# Altium PCB pcbRocketry.pcbdoc
Units mil, origin at the board's own origin, x right, y up, seen from the top; angles counter-clockwise.
Board outline 4335 x 3060 mil, 2 copper layers (Top Layer, Bottom Layer); 27 components, 17 nets, 147 pads, 21 vias.
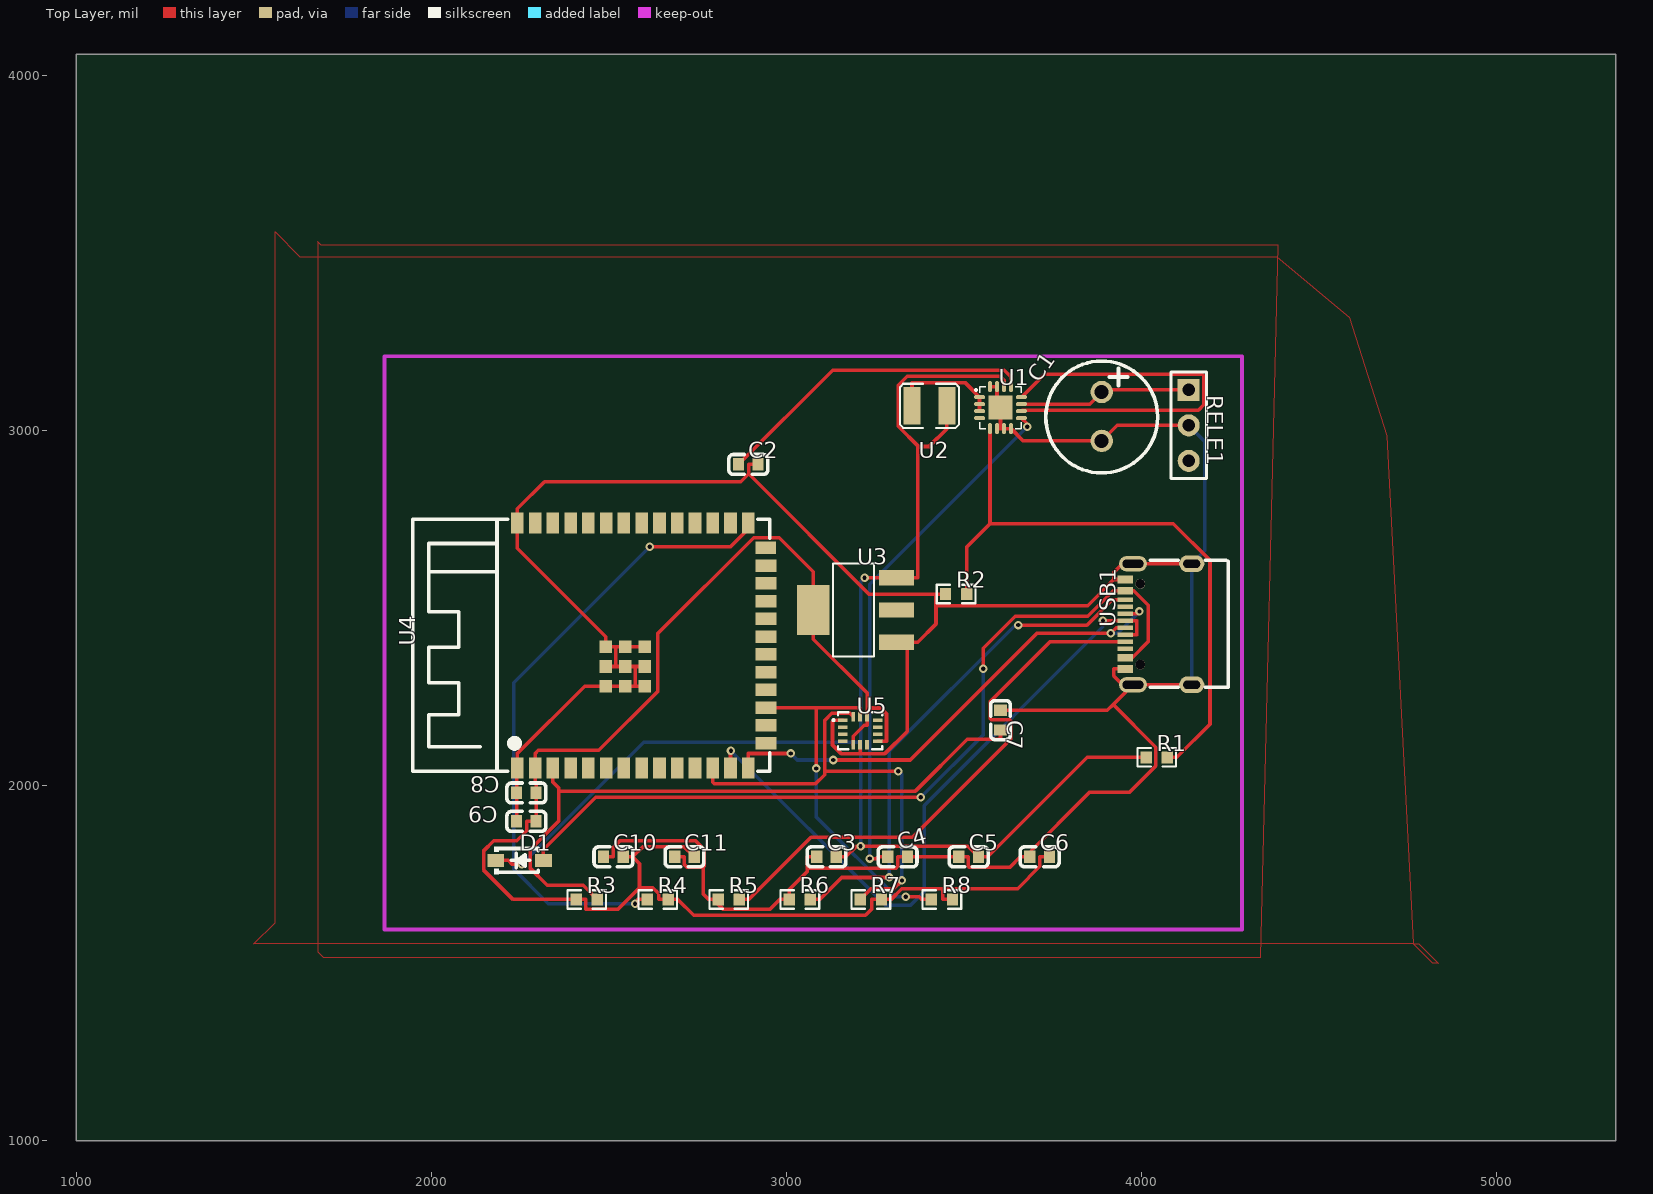
[diagram p0: Top Layer view]
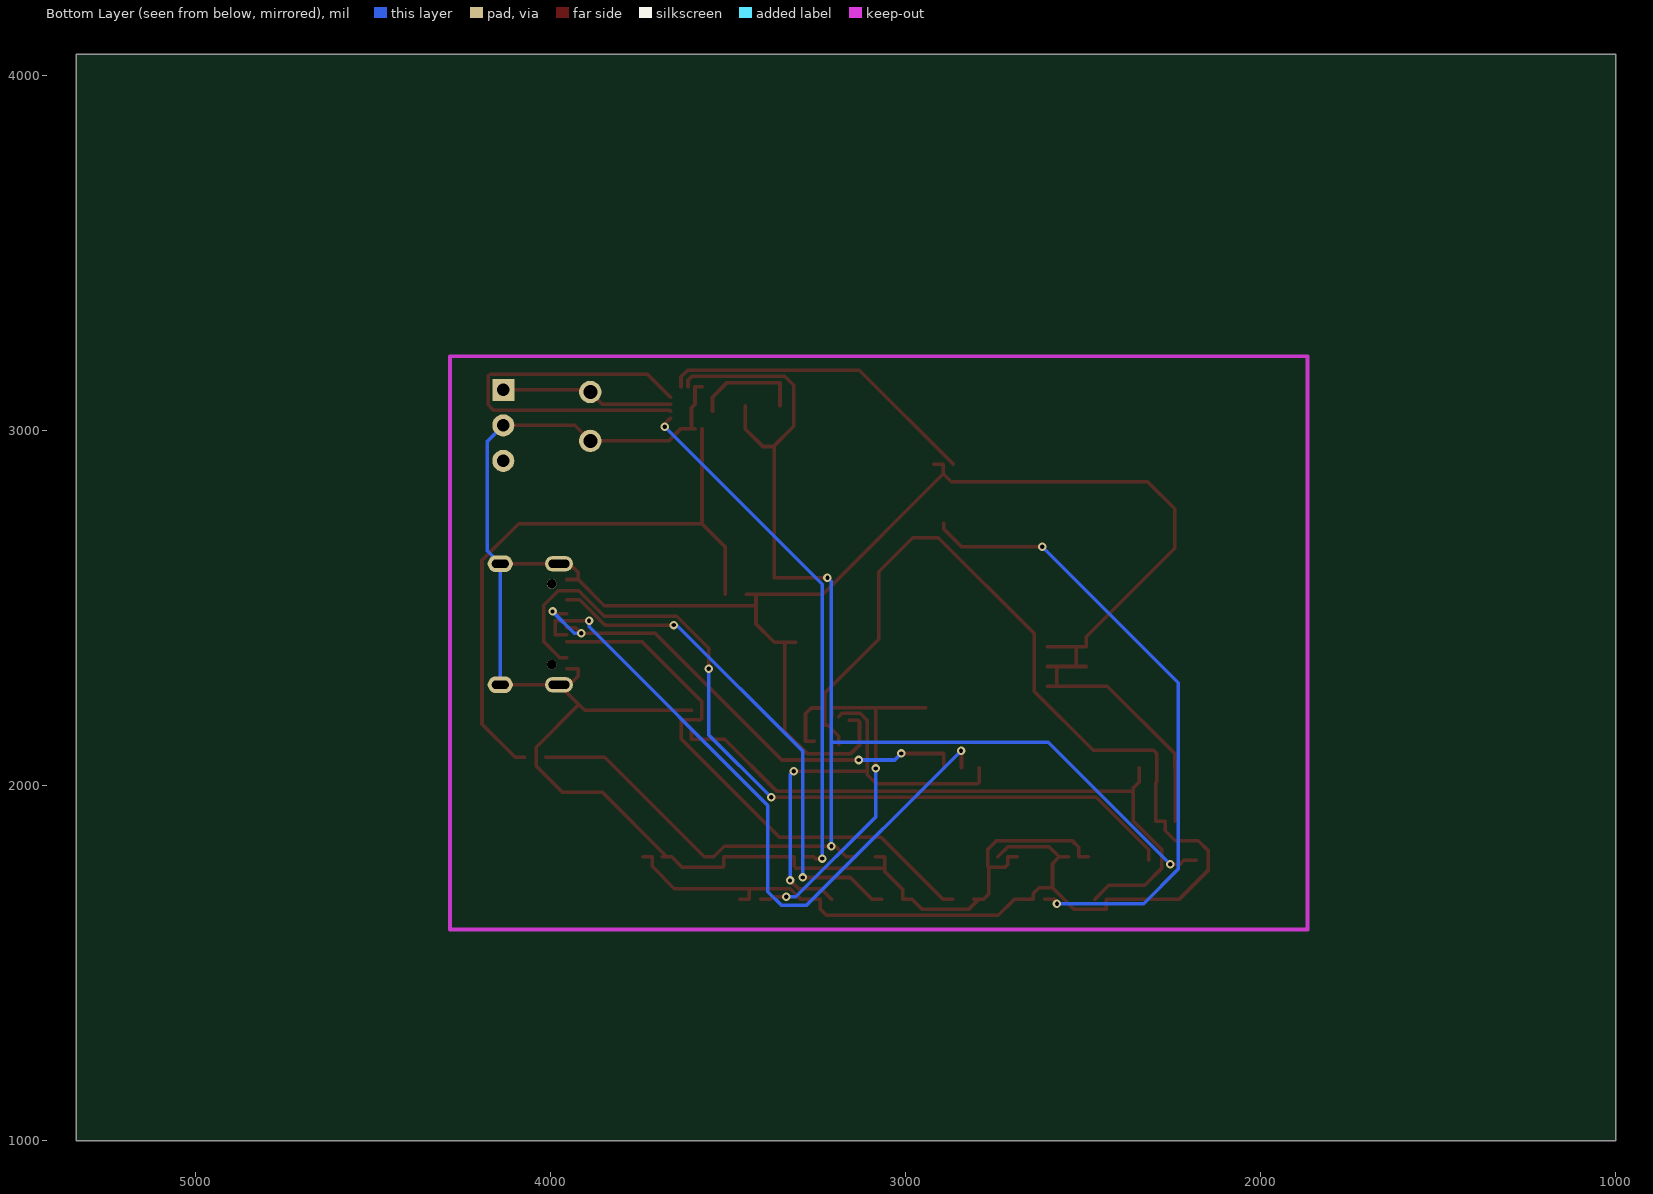
[diagram p1: Bottom Layer view, seen from below]

## Layer stack, top to bottom
Top Layer: signal copper (thickness not stored)
Dielectric: dielectric 12.6, FR-4, Dk 4.8
Bottom Layer: signal copper (thickness not stored)

## Board outline
5335,1000 1000,1000 1000,4060 5335,4060

## Components (designator, comment, footprint, x,y, rotation, side; value= is the part's Value field where it differs from the comment)
C1 "470uF" CAP-TH_BD8.0-P3.50-D0.5-FD_470UF25VF140KM 3887.5,3040 r270 top
C2 "10uF" C0603 2892.5,2905 r0 top
C3 "22uF" C0603 3112.69,1800 r0 top
C4 "3.3nF" C0603 3312.69,1800 r0 top
C5 "10uF" C0603 3512.69,1800 r0 top
C6 "22uF" C0603 3712.69,1800 r0 top
C7 "1uF" C0603 3602.5,2185 r270 top
C8 "0.1uF" C0603 2267.5,1980 r180 top
C9 "10uF" C0603 2267.5,1900 r0 top
C10 "0.1uF" C0603 2512.69,1800 r0 top
C11 "0.1u" C0603 2712.69,1800 r0 top
D1 "1N5819HW" SOD-123_L2.7-W1.6-LS3.7-RD-1 2248.52,1790 r0 top
R1 "523k" R0603 4042.5,2080 r0 top
R2 "100k" R0603 3477.5,2540 r0 top
R3 "10k" R0603 2437.5,1680 r0 top
R4 "10k" R0603 2637.5,1680 r0 top
R5 "5.1k" R0603 2837.5,1680 r0 top
R6 "5.1k" R0603 3037.5,1680 r0 top
R7 "4.7k" R0603 3237.5,1680 r0 top
R8 "4.7k" R0603 3437.5,1680 r0 top
RELE1 "UBEC" HDR-M-2.54_1X3 4132.5,3015 r270 top
U1 "TPS62130RGTRF0" VQFN-16_L3.0-W3.0-P0.50-TL-EP1.7 3602.5,3065 r0 top
U2 "2.2uH" IND-SMD_L3.2-W2.5_CKST322512-2.2UH 3402.5,3070 r0 top
U3 "AMS1117-3.3_C22466222" SOT-223-3_L6.5-W3.4-P2.30-LS7.0-BR 3192.5,2495 r0 top
U4 "ESP32-S3-WROOM-1(N8R2)" WIRELM-SMD_ESP32-S3-WROOM-1 2592.5,2395 r90 top
U5 "ICM42688P" LGA-14_L3.0-W2.5-P0.50-TL 3207.5,2155 r0 top
USB1 "TYPE-C 16PIN 2MD(073)" USB-C-SMD_TYPE-C-6PIN-2MD-073 4047.5,2455 r90 top

## Footprints (in the part's own frame and the unit in brackets; to place one, negate y for a bottom-side part, rotate by r counter-clockwise, add the part's x,y. Pads: shape width x height; smd on the part's side, far side on the other; paste and mask are expansions set on the pad)
C0603 [mm]
  rect 0.8x0.9 smd paste+0 mask+0.051: 1(-0.7,0) 2(0.7,0)
  silkscreen extent -1.39,-0.71 1.39,0.71
CAP-TH_BD8.0-P3.50-D0.5-FD_470UF25VF140KM [mm]
  round 1.6 hole 1 paste+0 mask+0.051: 1(-1.75,0) 2(1.75,0)
  silkscreen extent -3.96,-4 4.04,4
HDR-M-2.54_1X3 [mil]
  rect 62x62 hole 35 paste+0 mask+2: 1(-100,0)
  round 62 hole 35 paste+0 mask+2: 2(0,0) 3(100,0)
  silkscreen extent -150,-50 150,50
IND-SMD_L3.2-W2.5_CKST322512-2.2UH [mm]
  rect 1.2x2.7 smd paste+0 mask+0.051: 1(-1.25,0) 2(1.25,0)
  silkscreen extent -2.1,-1.58 2.1,1.58
LGA-14_L3.0-W2.5-P0.50-TL [mm]
  rect 0.675x0.28 smd paste+0 mask+0.051: 1(-1.262,0.75) 2(-1.262,0.25) 3(-1.262,-0.25) 4(-1.262,-0.75) 8(1.262,-0.75) 9(1.262,-0.25) 10(1.262,0.25) 11(1.262,0.75)
  rect 0.28x0.675 smd paste+0 mask+0.051: 5(-0.5,-1.012) 6(0,-1.012) 7(0.5,-1.012) 12(0.5,1.012) 13(0,1.012) 14(-0.5,1.012)
  silkscreen extent -1.98,-1.33 1.58,1.33
R0603 [mil]
  rect 31.75x34.02 smd paste-3937.01 mask+2: 1(-29.66,0) 2(29.66,0)
  silkscreen extent -55,-26 55,26
SOD-123_L2.7-W1.6-LS3.7-RD-1 [mm]
  rect 1.2x0.95 smd paste+0 mask+0.051: 1(-1.7,0) 2(1.7,0)
  silkscreen extent -1.81,-0.98 1.35,0.98
SOT-223-3_L6.5-W3.4-P2.30-LS7.0-BR [mm]
  rect 2.5x1.1 smd paste+0 mask+0.051: 1(2.97,-2.3) 2(2.97,0) 3(2.97,2.3)
  rect 2.34x3.6 smd paste+0 mask+0.051: 4(-2.97,0)
  silkscreen extent -1.57,-3.33 1.37,3.33
USB-C-SMD_TYPE-C-6PIN-2MD-073 [mm]
  rect 0.55x1.1 smd paste-100 mask+0.05: 1(-3.2,2.375) 2(-2.4,2.375) 11(2.4,2.375) 12(3.2,2.375)
  rect 0.3x1.1 smd paste-100 mask+0.05: 3(-1.75,2.375) 4(-1.25,2.375) 5(-0.75,2.375) 6(-0.25,2.375) 7(0.25,2.375) 8(0.75,2.375) 9(1.25,2.375) 10(1.75,2.375)
  oval 1.2x1.8 hole 0.6 slot 1.2 at 90 deg paste+0 mask+0.05: 13(-4.325,-2.375) 14(4.325,-2.375)
  oval 1.1x2 hole 0.6 slot 1.5 at 90 deg paste+0 mask+0.05: 13(-4.325,1.825) 14(4.325,1.825)
  round 0.7 hole 0.7 unplated paste+0: ""(-2.89,1.305) ""(2.89,1.305)
  silkscreen extent -4.5,-4.97 4.57,0.6
VQFN-16_L3.0-W3.0-P0.50-TL-EP1.7 [mm]
  oval 0.8x0.28 smd paste-100 mask+0.05: 1(-1.5,0.75) 2(-1.5,0.25) 3(-1.5,-0.25) 4(-1.5,-0.75) 9(1.5,-0.75) 10(1.5,-0.25) 11(1.5,0.25) 12(1.5,0.75)
  oval 0.28x0.8 smd paste-100 mask+0.05: 5(-0.75,-1.5) 6(-0.25,-1.5) 7(0.25,-1.5) 8(0.75,-1.5) 13(0.75,1.5) 14(0.25,1.5) 15(-0.25,1.5) 16(-0.75,1.5)
  rect 1.7x1.7 smd paste-100 mask+0.05: 17(0,0)
  silkscreen extent -1.76,-1.5 1.5,1.5
WIRELM-SMD_ESP32-S3-WROOM-1 [mm]
  rect 1.5x0.9 smd paste+0 mask+0.05: 1(-8.75,8.895) 2(-8.75,7.625) 3(-8.75,6.355) 4(-8.75,5.085) 5(-8.75,3.815) 6(-8.75,2.545) 7(-8.75,1.275) 8(-8.75,0.005) 9(-8.75,-1.265) 10(-8.75,-2.535) 11(-8.75,-3.805) 12(-8.75,-5.075) 13(-8.75,-6.345) 14(-8.75,-7.615) 27(8.75,-7.615) 28(8.75,-6.345) 29(8.75,-5.075) 30(8.75,-3.805) 31(8.75,-2.535) 32(8.75,-1.265) 33(8.75,0.005) 34(8.75,1.275) 35(8.75,2.545) 36(8.75,3.815) 37(8.75,5.085) 38(8.75,6.355) 39(8.75,7.625) 40(8.75,8.895)
  rect 0.9x1.5 smd paste+0 mask+0.05: 15(-6.985,-8.895) 16(-5.715,-8.895) 17(-4.445,-8.895) 18(-3.175,-8.895) 19(-1.905,-8.895) 20(-0.635,-8.895) 21(0.635,-8.895) 22(1.905,-8.895) 23(3.175,-8.895) 24(4.445,-8.895) 25(5.715,-8.895) 26(6.985,-8.865)
  rect 0.9x0.9 smd paste+0 mask+0.051: 41(-2.9,-0.225) 41(-2.9,1.175) 41(-2.9,2.575) 41(-1.501,2.575) 41(-1.501,-0.225) 41(-1.501,1.175) 41(-0.1,2.575) 41(-0.1,1.175) 41(-0.1,-0.225)
  silkscreen extent -9,-9.14 9.02,16.39

## Via types
v1: diameter 24, hole 12, Top Layer to Bottom Layer, tented both sides, 21 vias

## Nets (pads, with @x,y where several pads share a name; then routed paths per layer and width w, separated by ;. In a path a pad name is that pad's centre, name@x,y a point inside that pad or via, vN(x,y) a via of type N, cw(c..) or ccw(c..) an arc to the next point about the centre after c; other vN are vias at no path point)
+3.3V: C6.2 C8.1 C9.2 C10.2 C11.2 R3.1 R4.2 R7.2 R8.2 U3.4 U4.2 U5.5 U5.8 U5.12 | length 4548.1
  Top Layer w10: C10.2@2540.25,1800 2567.01,1800 ; C11.2@2740.25,1800 2711.47,1828.78 2595.79,1828.78 2567.01,1800 ; U5.5 3187.82,2139.43 3218.96,2170.57 3227.19,2170.57 U5.12 3227.19,2219.16 ; U5.8 3281.48,2125.47 3281.52,2125.51 3281.52,2203.39 3265.75,2219.16 3227.19,2219.16 ; R8.2 3440.27,1680 3440.27,1710.41 ; C6.2@3740.25,1800 3713.49,1800 3713.49,1773.24 3650.66,1710.41 3440.27,1710.41 ; 2567.01,1800 2586.12,1780.89 2586.12,1713.4 ; 2586.12,1713.4 2623.58,1713.4 2640.27,1696.71 2640.27,1680 R4.2 2694.04,1680 2738.95,1635.09 3222.25,1635.09 3240.27,1653.11 3240.27,1680 R7.2 3294.04,1680 3324.45,1710.41 3440.27,1710.41 ; 2586.12,1713.4 2524.65,1651.93 2435.92,1651.93 2434.73,1653.12 2434.73,1680 2407.85,1680 2230.06,1680 2146.91,1763.15 2146.91,1816.53 2175.87,1845.49 2240.55,1845.49 2268.3,1873.24 2268.3,1900 C9.2 C8.1 2295.06,1994.37 2295.06,2008.73 2293.82,2009.97 2292.3,2009.97 U4.2 2292.3,2091.05 2301.03,2099.78 2471.66,2099.78 2638.04,2266.16 2638.04,2429.45 2907.37,2698.78 2979.45,2698.78 3075.57,2602.66 U3.4 3075.57,2492.88 3075.57,2413.12 3227.19,2261.5 3227.19,2219.16
+5V: C3.2 C5.2 D1.1 R1.1 U1.14 U2.2 U3.3 | length 4159.9
  Top Layer w10: D1.1 2216.22,1790 2227.09,1779.13 v1(2254.66,1779.13) ; C3.2@3140.25,1800 3153.63,1800 3167.01,1800 3197.04,1830.03 v1(3208.53,1830.03) 3510.22,1830.03 3540.25,1800 3567.01,1800 3847.01,2080 R1.1@4012.85,2080 ; v1(3219.75,2585.55) 3249.2,2585.55 U3.3 3369.65,2585.55 3369.65,2953.53 3371.5,2955.38 ; U2.2 3451.71,3005.84 3401.25,2955.38 3371.5,2955.38 ; U1.14@3612.35,3124.05 3612.35,3141.97 3601.23,3153.09 3339.64,3153.09 3314.76,3128.21 3314.76,3012.12 3371.5,2955.38
  Bottom Layer w10: v1(2254.66,1779.13) 2598.28,2122.75 3208.53,2122.75 ; v1(3208.53,1830.03) 3208.53,2122.75 ; v1(3219.75,2585.55) 3208.53,2574.33 3208.53,2122.75
+7.4V: C1.1 C2.1 RELE1.1 U1.11 U1.13 | length 1400.1
  Top Layer w10: C2.1 3130.51,3170.57 3613.03,3170.57 3632.03,3151.57 U1.13@3632.03,3124.05 ; U1.11 3853.44,3074.84 C1.1 3893.6,3115 RELE1.1
D+: U4.14 USB1.6 USB1.8 | length 1412.6
  Top Layer w10: U4.14 2892.3,2091.05 v1(3011.62,2091.05) ; v1(3131.51,2072.72) 3348.21,2072.72 3705.15,2429.66 v1(3913.04,2429.66) 3928.53,2445.15 3937.66,2445.15 USB1.6 ; USB1.8 3987.29,2484.52 v1(3993.73,2490.96)
  Bottom Layer w10: v1(3011.62,2091.05) 3029.95,2072.72 v1(3131.51,2072.72) ; v1(3913.04,2429.66) 3932.43,2429.66 v1(3993.73,2490.96)
D-: U4.13 USB1.5 USB1.7 | length 1928.1
  Top Layer w10: U4.13 2842.3,2097.28 v1(2843.43,2098.41) ; v1(3890.86,2464.84) USB1.7 3970.33,2464.84 3986.66,2464.84 3986.7,2464.8 3986.7,2425.51 3986.66,2425.47 USB1.5
  Bottom Layer w10: v1(2843.43,2098.41) 3278.52,1663.32 3349.25,1663.32 3387.48,1701.55 3387.48,1944.43 3890.86,2447.81 v1(3890.86,2464.84)
GND: C1.2 C2.2 C3.1 C4.2 C5.1 C6.1 C7.1 C8.2 C9.1 C10.1 C11.1 R2.1 R5.1 R6.1 RELE1.2 U1.6 U1.7 U1.8 U1.15 U1.16 U1.17 U3.1 U4.1 U4.40 U4.41 U5.1 U5.6 USB1.1 USB1.12 USB1.13 USB1.14 | length 9128.3
  Top Layer w10: C9.1 C8.2 2239.94,2068.42 U4.1@2242.3,2070.78 ; U4.1 U4.1@2242.3,2070.78 ; C10.1 2511.89,1800 2511.89,1826.76 2529.97,1844.84 2744.51,1844.84 2768.47,1820.88 2768.47,1774.13 2765.56,1771.22 ; U4.41@2491.13,2335.94 2518.69,2335.94 ; U4.41@2601.36,2280.82 2573.81,2280.82 ; U4.41@2601.37,2335.94 2573.81,2335.94 ; U4.41@2601.36,2391.06 2546.25,2391.06 2518.69,2391.06 ; C11.1 2711.89,1800 2711.89,1778.41 2719.08,1771.22 2765.56,1771.22 ; R5.1@2807.85,1680 R5.1@2794.41,1680 ; C2.2 2893.3,2905 2893.3,2878.24 ; C3.1 3058.38,1800 3058.38,1767.3 ; U5.1 3133.51,2184.53 3129.53,2180.55 3129.53,2114.84 3153.58,2090.79 3207.5,2090.79 ; U5.6 3207.5,2090.84 3207.5,2090.79 ; U3.1 U3.1@3339.54,2404.45 ; R2.1@3447.85,2540 3420.96,2540 ; U1.16@3572.98,3124.05 3592.66,3124.05 3592.66,3074.84 U1.17 3602.51,3020.52 3602.51,3005.94 ; U1.6@3592.66,3005.94 3602.51,3005.94 ; C7.1 3903.49,2212.56 3919.87,2228.94 ; C6.1 C6.1@3671.76,1800 ; USB1.1 3921.33,2329.01 3921.33,2309.29 3945.9,2284.72 USB1.13@3975.65,2284.72 ; USB1.12 3921.33,2580.98 ; RELE1.2 3931.4,3015 C1.2 3666.86,2971.11 3632.03,3005.94 3612.35,3005.94 3602.51,3005.94 ; USB1.13@4141.01,2284.72 USB1.13@3975.65,2284.72 ; USB1.14@4141.01,2625.27 3975.65,2625.27 3945.9,2625.27 3921.33,2600.7 3921.33,2580.98 ; U4.1@2242.3,2070.78 2242.3,2091.05 2432.07,2280.82 2491.13,2280.82 2546.25,2280.82 2573.81,2280.82 ; 2518.69,2335.94 2518.69,2391.06 ; 2518.69,2335.94 2546.25,2335.94 2573.81,2335.94 ; 2518.69,2391.06 2491.13,2391.06 2491.13,2419.79 2242.3,2668.62 U4.40 2242.3,2780.03 2318.73,2856.46 2871.52,2856.46 2893.3,2878.24 ; 2573.81,2280.82 2573.81,2335.94 ; 2765.56,1771.22 2765.56,1695.4 2780.96,1680 R5.1@2794.41,1680 ; R5.1@2794.41,1680 2822.48,1651.93 2952.89,1651.93 2980.96,1680 3007.85,1680 3007.85,1708.02 3058.38,1758.55 3058.38,1767.3 ; 2893.3,2878.24 3231.54,2540 3420.96,2540 ; 3058.38,1767.3 3307.55,1767.3 3313.49,1773.24 3313.49,1800 3340.25,1800 C5.1 3498.51,1800 3511.89,1800 3511.89,1773.24 3513.91,1771.22 3629.6,1771.22 3658.38,1800 C6.1@3671.76,1800 ; 3207.5,2090.79 3277.22,2090.79 3339.54,2153.11 U3.1@3339.54,2404.45 ; U3.1@3339.54,2404.45 3369.65,2404.45 3420.96,2455.76 3420.96,2507.41 ; 3420.96,2507.41 3847.76,2507.41 3921.33,2580.98 ; 3420.96,2507.41 3420.96,2540 ; C6.1@3671.76,1800 3854.21,1982.45 3966.29,1982.45 4039.78,2055.94 4039.78,2109.03 3919.87,2228.94 ; 3919.87,2228.94 USB1.13@3975.65,2284.72
  Bottom Layer w10: RELE1.2 4178.08,2969.42 4178.08,2662.34 4141.01,2625.27 USB1.13@4141.01,2284.72
SCL: R8.1 U4.17 U5.13 | length 1017.4
  Top Layer w10: U4.17 3084.01,2220 ; v1(3084.01,2049.1) 3084.01,2220 ; U5.13 3207.5,2219.16 3206.66,2220 3084.01,2220 ; v1(3335.47,1687.33) 3373.63,1687.33 3380.96,1680 R8.1@3407.85,1680
  Bottom Layer w10: v1(3084.01,2049.1) 3084.01,1912.05 3308.73,1687.33 v1(3335.47,1687.33)
SDA: R7.1 U4.12 U5.14 | length 1271.6
  Top Layer w10: U4.12 2792.3,2009.97 2796.86,2005.41 3081.6,2005.41 3107.58,2031.39 3107.58,2041.39 ; U5.14 3178.74,2203.94 3127.39,2203.94 3107.58,2184.13 3107.58,2041.39 ; R7.1@3207.85,1680 3237.49,1709.64 3300.97,1709.64 v1(3324.96,1733.63) ; v1(3314.27,2041.39) 3107.58,2041.39
  Bottom Layer w10: v1(3314.27,2041.39) 3324.96,2030.7 v1(3324.96,1733.63)
U1_1: U1.1 U1.2 U1.3 U2.1 | length 311.2
  Top Layer w10: U2.1 3353.29,3134.16 3354.55,3135.42 3502.55,3135.42 U1.1 U1.2 U1.3
U1_5: R1.2 R2.2 U1.5 | length 1775.9
  Top Layer w10: R2.2 3507.16,2672.46 3572.98,2738.28 ; U1.5@3572.98,3005.94 3572.98,2738.28 ; R1.2 4099.04,2080 4192.47,2173.43 4192.47,2634.79 4088.98,2738.28 3572.98,2738.28
U1_9: C4.1 U1.9 | length 1483.1
  Top Layer w10: v1(3234.73,1795.17) 3253.55,1795.17 3258.38,1800 C4.1 ; U1.9 3677.92,3019.11 v1(3677.92,3010.77)
  Bottom Layer w10: v1(3234.73,1795.17) 3234.73,2567.58 v1(3677.92,3010.77)
U1_10: U1.10 U1.12 | length 1143.7
  Top Layer w10: U1.10 3664.33,3057.92 4159.8,3057.92 4174.56,3072.68 4174.56,3154.15 4169.44,3159.27 3726.31,3159.27 U1.12
U4_3: C7.2 R3.2 U4.3 | length 1879
  Top Layer w10: U4.3 2342.3,2009.97 2359.26,1993.01 2359.26,1985.22 ; R3.2 2427.22,1719.94 2326.36,1719.94 2277.91,1768.39 2277.91,1820.13 2359.26,1901.48 2359.26,1985.22 ; C7.2 3602.5,2130.68 3508.53,2130.68 3363.07,1985.22 2359.26,1985.22
U4_27: R4.1 U4.27 | length 1804.9
  Top Layer w10: v1(2573.57,1668.25) 2580.96,1675.64 2580.96,1680 R4.1@2607.85,1680 ; v1(2614.82,2673.02) 2842.37,2673.02 2892.3,2722.95 U4.27
  Bottom Layer w10: v1(2573.57,1668.25) 2328.94,1668.25 2231.6,1765.59 2231.6,2289.8 v1(2614.82,2673.02)
USB1_4: R5.2 USB1.4 | length 1561.2
  Top Layer w10: R5.2 2894.04,1680 3069.12,1855.08 3354.66,1855.08 3631.28,2131.7 3631.28,2182.84 3628.37,2185.75 3576.63,2185.75 3573.72,2188.66 3573.72,2237.62 3741.89,2405.79 USB1.4
USB1_10: R6.2 USB1.10 | length 1444.9
  Top Layer w10: R6.2 3094.04,1680 3155.94,1741.9 v1(3289.54,1741.9) ; v1(3652.32,2452.51) 3845.93,2452.51 3917.32,2523.9 3921.33,2523.9 USB1.10
  Bottom Layer w10: v1(3289.54,1741.9) 3289.54,2097.85 3644.2,2452.51 v1(3652.32,2452.51)
VBUS: D1.2 USB1.2 USB1.11 | length 2381.7
  Top Layer w10: D1.2@2315.45,1790 2315.45,1819.71 2463.22,1967.48 v1(3377.93,1967.48) ; v1(3553.61,2329.32) 3553.61,2387.41 3643.99,2477.79 3848.5,2477.79 3920.2,2549.49 USB1.11 3978.04,2549.49 4018.93,2508.6 4018.93,2406.28 3973.16,2360.51 USB1.2
  Bottom Layer w10: v1(3377.93,1967.48) 3553.61,2143.16 v1(3553.61,2329.32)
pads on no net: RELE1.3 U1.4 U3.2 U4.4 U4.5 U4.6 U4.7 U4.8 U4.9 U4.10 U4.11 U4.15 U4.16 U4.18 U4.19 U4.20 U4.21 U4.22 U4.23 U4.24 U4.25 U4.26 U4.28 U4.29 U4.30 U4.31 U4.32 U4.33 U4.34 U4.35 U4.36 U4.37 U4.38 U4.39 U5.2 U5.3 U5.4 U5.7 U5.9 U5.10 U5.11 USB1. USB1.3 USB1.9

## Polygon pours and split planes (outlines as drawn)
GND on Top Layer (solid): 4385,3522.5 1690,3522.5 1680,3532.5 1680,1532.5 1695,1517.5 4310,1517.5 4335,1517.5
+3.3V on Top Layer (solid): 4780,1555 4835,1500 4820,1500 4764.28,1555 1500,1555 1560,1615 1560,3560 1630,3490 4380,3490 4585,3320 4690,2985 4764.28,1555 4780,1555
GND on Internal Plane 2 (split plane): 95 vertices, not listed, extent 3317.37,1669.24 3353.57,1705.42
GND on Internal Plane 2 (split plane): 95 vertices, not listed, extent 3306.86,1715.54 3343.06,1751.72
GND on Internal Plane 2 (split plane): 95 vertices, not listed, extent 3271.44,1723.81 3307.64,1759.99
GND on Internal Plane 2 (split plane): 95 vertices, not listed, extent 2236.56,1761.04 2272.76,1797.22
GND on Internal Plane 2 (split plane): 95 vertices, not listed, extent 3216.63,1777.08 3252.83,1813.26
GND on Internal Plane 2 (split plane): 95 vertices, not listed, extent 3190.43,1811.94 3226.63,1848.12
GND on Internal Plane 2 (split plane): 95 vertices, not listed, extent 3359.83,1949.39 3396.03,1985.57
GND on Internal Plane 2 (split plane): 95 vertices, not listed, extent 3296.17,2023.3 3332.37,2059.48
GND on Internal Plane 2 (split plane): 95 vertices, not listed, extent 3065.91,2031.01 3102.11,2067.19
GND on Internal Plane 2 (split plane): 95 vertices, not listed, extent 3113.41,2054.63 3149.61,2090.81
GND on Internal Plane 2 (split plane): 95 vertices, not listed, extent 2993.52,2072.96 3029.72,2109.14
GND on Internal Plane 2 (split plane): 95 vertices, not listed, extent 2825.33,2080.32 2861.53,2116.5
GND on Internal Plane 2 (split plane): 43 vertices, not listed, extent 4158.73,2255.69 4179.98,2272.91
GND on Internal Plane 2 (split plane): 43 vertices, not listed, extent 4102.04,2255.69 4123.29,2272.91
GND on Internal Plane 2 (split plane): 48 vertices, not listed, extent 3995.34,2257.14 4018.81,2273.89
GND on Internal Plane 2 (split plane): 48 vertices, not listed, extent 3932.49,2257.14 3955.97,2273.89
GND on Internal Plane 2 (split plane): 48 vertices, not listed, extent 3995.34,2295.55 4018.81,2312.3
GND on Internal Plane 2 (split plane): 48 vertices, not listed, extent 3932.49,2295.55 3955.97,2312.3
GND on Internal Plane 2 (split plane): 43 vertices, not listed, extent 4158.73,2296.53 4179.98,2313.75
GND on Internal Plane 2 (split plane): 43 vertices, not listed, extent 4102.04,2296.53 4123.29,2313.75
GND on Internal Plane 2 (split plane): 95 vertices, not listed, extent 3535.51,2311.23 3571.71,2347.41
GND on Internal Plane 2 (split plane): 100 vertices, not listed, extent 3976.26,2321.34 4016.01,2361.1
GND on Internal Plane 2 (split plane): 95 vertices, not listed, extent 3894.94,2411.57 3931.14,2447.75
GND on Internal Plane 2 (split plane): 95 vertices, not listed, extent 3634.22,2434.42 3670.42,2470.6
GND on Internal Plane 2 (split plane): 95 vertices, not listed, extent 3872.76,2446.75 3908.96,2482.93
GND on Internal Plane 2 (split plane): 95 vertices, not listed, extent 3975.63,2472.87 4011.83,2509.05
GND on Internal Plane 2 (split plane): 100 vertices, not listed, extent 3976.26,2548.9 4016.01,2588.66
GND on Internal Plane 2 (split plane): 95 vertices, not listed, extent 3201.65,2567.46 3237.85,2603.64
GND on Internal Plane 2 (split plane): 43 vertices, not listed, extent 4158.73,2596.24 4179.98,2613.46
GND on Internal Plane 2 (split plane): 43 vertices, not listed, extent 4102.04,2596.24 4123.29,2613.46
GND on Internal Plane 2 (split plane): 48 vertices, not listed, extent 3995.34,2597.69 4018.81,2614.44
GND on Internal Plane 2 (split plane): 48 vertices, not listed, extent 3932.49,2597.69 3955.97,2614.44
GND on Internal Plane 2 (split plane): 48 vertices, not listed, extent 3995.34,2636.1 4018.81,2652.85
GND on Internal Plane 2 (split plane): 48 vertices, not listed, extent 3932.49,2636.1 3955.97,2652.85
GND on Internal Plane 2 (split plane): 43 vertices, not listed, extent 4158.73,2637.08 4179.98,2654.3
GND on Internal Plane 2 (split plane): 43 vertices, not listed, extent 4102.04,2637.08 4123.29,2654.3
GND on Internal Plane 2 (split plane): 95 vertices, not listed, extent 2596.72,2654.93 2632.92,2691.11
GND on Internal Plane 2 (split plane): 136 vertices, not listed, extent 4095.41,2877.9 4169.6,2952.1
GND on Internal Plane 2 (split plane): 19 vertices, not listed, extent 3903.25,2936.97 3921.63,2955.35
GND on Internal Plane 2 (split plane): 19 vertices, not listed, extent 3853.37,2936.97 3871.75,2955.35
GND on Internal Plane 2 (split plane): 19 vertices, not listed, extent 4098.8,2981.29 4117,2999.5
GND on Internal Plane 2 (split plane): 19 vertices, not listed, extent 4148,2981.3 4166.2,2999.5
GND on Internal Plane 2 (split plane): 19 vertices, not listed, extent 3903.25,2986.85 3921.63,3005.23
GND on Internal Plane 2 (split plane): 19 vertices, not listed, extent 3853.37,2986.85 3871.75,3005.23
GND on Internal Plane 2 (split plane): 95 vertices, not listed, extent 3659.82,2992.68 3696.02,3028.86
GND on Internal Plane 2 (split plane): 19 vertices, not listed, extent 4148,3030.5 4166.2,3048.7
GND on Internal Plane 2 (split plane): 19 vertices, not listed, extent 4098.8,3030.5 4117,3048.71
GND on Internal Plane 2 (split plane): 137 vertices, not listed, extent 3849.9,3071.3 3925.1,3146.5
GND on Internal Plane 2 (split plane): 121 vertices, not listed, extent 4095.5,3078 4169.5,3152
GND on Internal Plane 1 (split plane): 1868.1,1595.5 1868.1,3209.6 4282.5,3209.6 4282.5,1595.5
GND on Internal Plane 1 (split plane): 95 vertices, not listed, extent 2555.47,1650.16 2591.67,1686.34
GND on Internal Plane 1 (split plane): 95 vertices, not listed, extent 3317.37,1669.24 3353.57,1705.42
GND on Internal Plane 1 (split plane): 95 vertices, not listed, extent 3306.86,1715.54 3343.06,1751.72
GND on Internal Plane 1 (split plane): 95 vertices, not listed, extent 3271.44,1723.81 3307.64,1759.99
GND on Internal Plane 1 (split plane): 95 vertices, not listed, extent 2236.56,1761.04 2272.76,1797.22
GND on Internal Plane 1 (split plane): 95 vertices, not listed, extent 3216.63,1777.08 3252.83,1813.26
GND on Internal Plane 1 (split plane): 95 vertices, not listed, extent 3190.43,1811.94 3226.63,1848.12
GND on Internal Plane 1 (split plane): 95 vertices, not listed, extent 3359.83,1949.39 3396.03,1985.57
GND on Internal Plane 1 (split plane): 95 vertices, not listed, extent 3296.17,2023.3 3332.37,2059.48
GND on Internal Plane 1 (split plane): 95 vertices, not listed, extent 3065.91,2031.01 3102.11,2067.19
GND on Internal Plane 1 (split plane): 95 vertices, not listed, extent 3113.41,2054.63 3149.61,2090.81
GND on Internal Plane 1 (split plane): 95 vertices, not listed, extent 2993.52,2072.96 3029.72,2109.14
GND on Internal Plane 1 (split plane): 95 vertices, not listed, extent 2825.33,2080.32 2861.53,2116.5
GND on Internal Plane 1 (split plane): 43 vertices, not listed, extent 4158.73,2255.69 4179.98,2272.91
GND on Internal Plane 1 (split plane): 43 vertices, not listed, extent 4102.04,2255.69 4123.29,2272.91
GND on Internal Plane 1 (split plane): 48 vertices, not listed, extent 3995.34,2257.14 4018.81,2273.89
GND on Internal Plane 1 (split plane): 48 vertices, not listed, extent 3932.49,2257.14 3955.97,2273.89
GND on Internal Plane 1 (split plane): 48 vertices, not listed, extent 3995.34,2295.55 4018.81,2312.3
GND on Internal Plane 1 (split plane): 48 vertices, not listed, extent 3932.49,2295.55 3955.97,2312.3
GND on Internal Plane 1 (split plane): 43 vertices, not listed, extent 4158.73,2296.53 4179.98,2313.75
GND on Internal Plane 1 (split plane): 43 vertices, not listed, extent 4102.04,2296.53 4123.29,2313.75
GND on Internal Plane 1 (split plane): 95 vertices, not listed, extent 3535.51,2311.23 3571.71,2347.41
GND on Internal Plane 1 (split plane): 100 vertices, not listed, extent 3976.26,2321.34 4016.01,2361.1
GND on Internal Plane 1 (split plane): 95 vertices, not listed, extent 3894.94,2411.57 3931.14,2447.75
GND on Internal Plane 1 (split plane): 95 vertices, not listed, extent 3634.22,2434.42 3670.42,2470.6
GND on Internal Plane 1 (split plane): 95 vertices, not listed, extent 3872.76,2446.75 3908.96,2482.93
GND on Internal Plane 1 (split plane): 95 vertices, not listed, extent 3975.63,2472.87 4011.83,2509.05
GND on Internal Plane 1 (split plane): 100 vertices, not listed, extent 3976.26,2548.9 4016.01,2588.66
GND on Internal Plane 1 (split plane): 95 vertices, not listed, extent 3201.65,2567.46 3237.85,2603.64
GND on Internal Plane 1 (split plane): 43 vertices, not listed, extent 4158.73,2596.24 4179.98,2613.46
GND on Internal Plane 1 (split plane): 43 vertices, not listed, extent 4102.04,2596.24 4123.29,2613.46
GND on Internal Plane 1 (split plane): 48 vertices, not listed, extent 3995.34,2597.69 4018.81,2614.44
GND on Internal Plane 1 (split plane): 48 vertices, not listed, extent 3932.49,2597.69 3955.97,2614.44
GND on Internal Plane 1 (split plane): 48 vertices, not listed, extent 3995.34,2636.1 4018.81,2652.85
GND on Internal Plane 1 (split plane): 48 vertices, not listed, extent 3932.49,2636.1 3955.97,2652.85
GND on Internal Plane 1 (split plane): 43 vertices, not listed, extent 4158.73,2637.08 4179.98,2654.3
GND on Internal Plane 1 (split plane): 43 vertices, not listed, extent 4102.04,2637.08 4123.29,2654.3
GND on Internal Plane 1 (split plane): 95 vertices, not listed, extent 2596.72,2654.93 2632.92,2691.11
GND on Internal Plane 1 (split plane): 136 vertices, not listed, extent 4095.41,2877.9 4169.6,2952.1
GND on Internal Plane 1 (split plane): 19 vertices, not listed, extent 3903.25,2936.97 3921.63,2955.35
GND on Internal Plane 1 (split plane): 19 vertices, not listed, extent 3853.37,2936.97 3871.75,2955.35
GND on Internal Plane 1 (split plane): 19 vertices, not listed, extent 4098.8,2981.29 4117,2999.5
GND on Internal Plane 1 (split plane): 19 vertices, not listed, extent 4148,2981.3 4166.2,2999.5
GND on Internal Plane 1 (split plane): 19 vertices, not listed, extent 3903.25,2986.85 3921.63,3005.23
GND on Internal Plane 1 (split plane): 19 vertices, not listed, extent 3853.37,2986.85 3871.75,3005.23
GND on Internal Plane 1 (split plane): 95 vertices, not listed, extent 3659.82,2992.68 3696.02,3028.86
GND on Internal Plane 1 (split plane): 19 vertices, not listed, extent 4148,3030.5 4166.2,3048.7
GND on Internal Plane 1 (split plane): 19 vertices, not listed, extent 4098.8,3030.5 4117,3048.71
GND on Internal Plane 1 (split plane): 137 vertices, not listed, extent 3849.9,3071.3 3925.1,3146.5
GND on Internal Plane 1 (split plane): 121 vertices, not listed, extent 4095.5,3078 4169.5,3152